# EAGLE board e-book_schema_v28 (EAGLE 9.7.0)
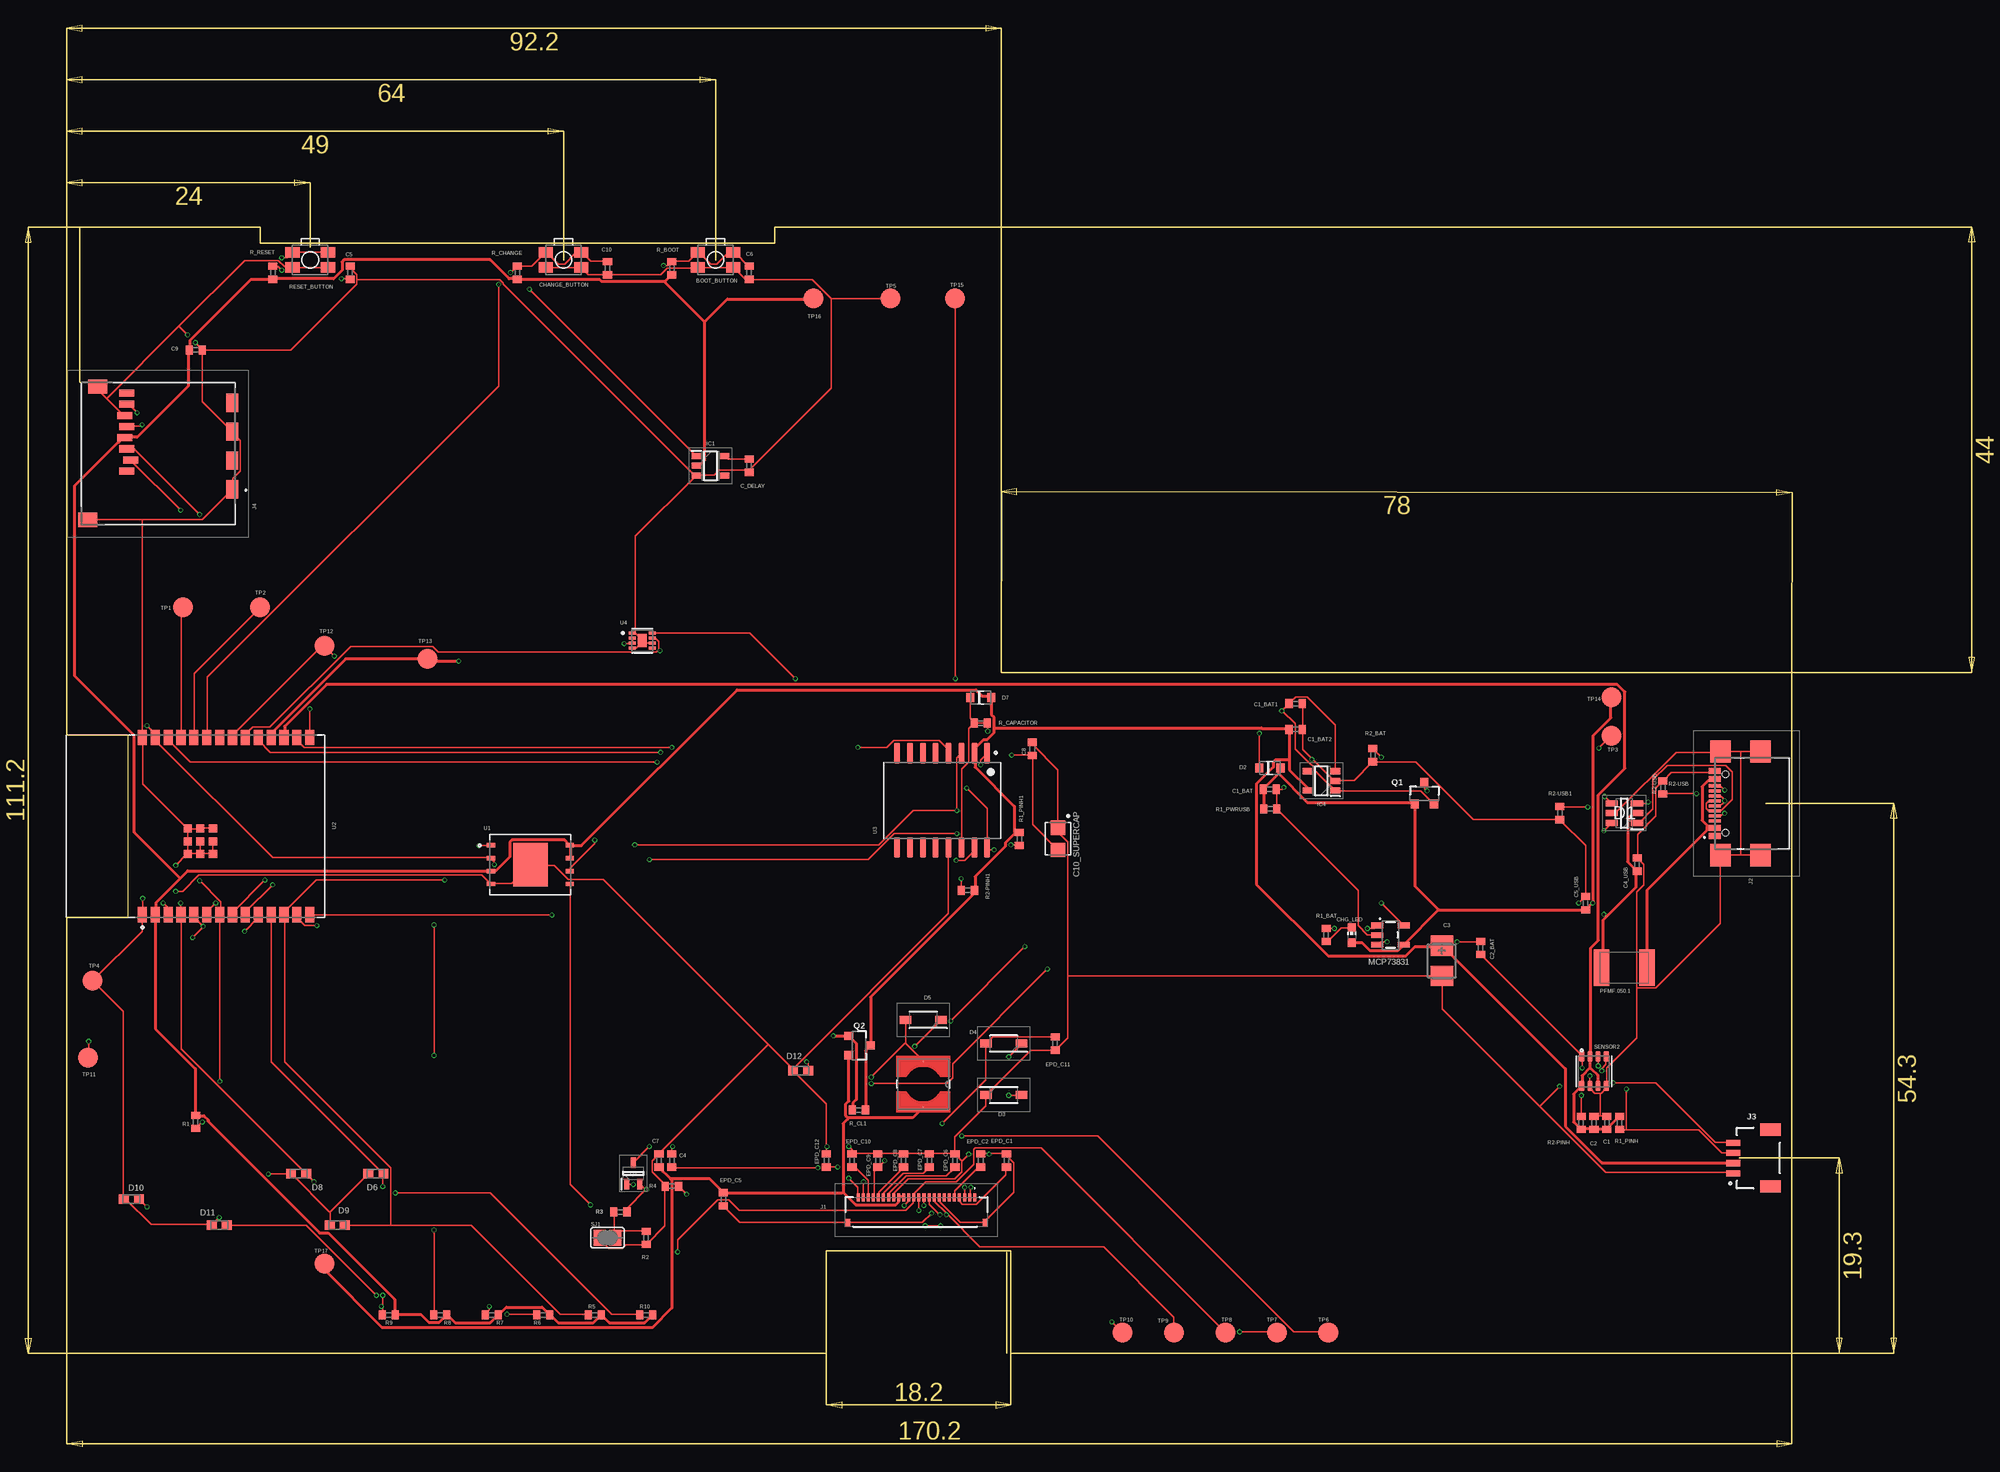
[diagram p0: board, top side]
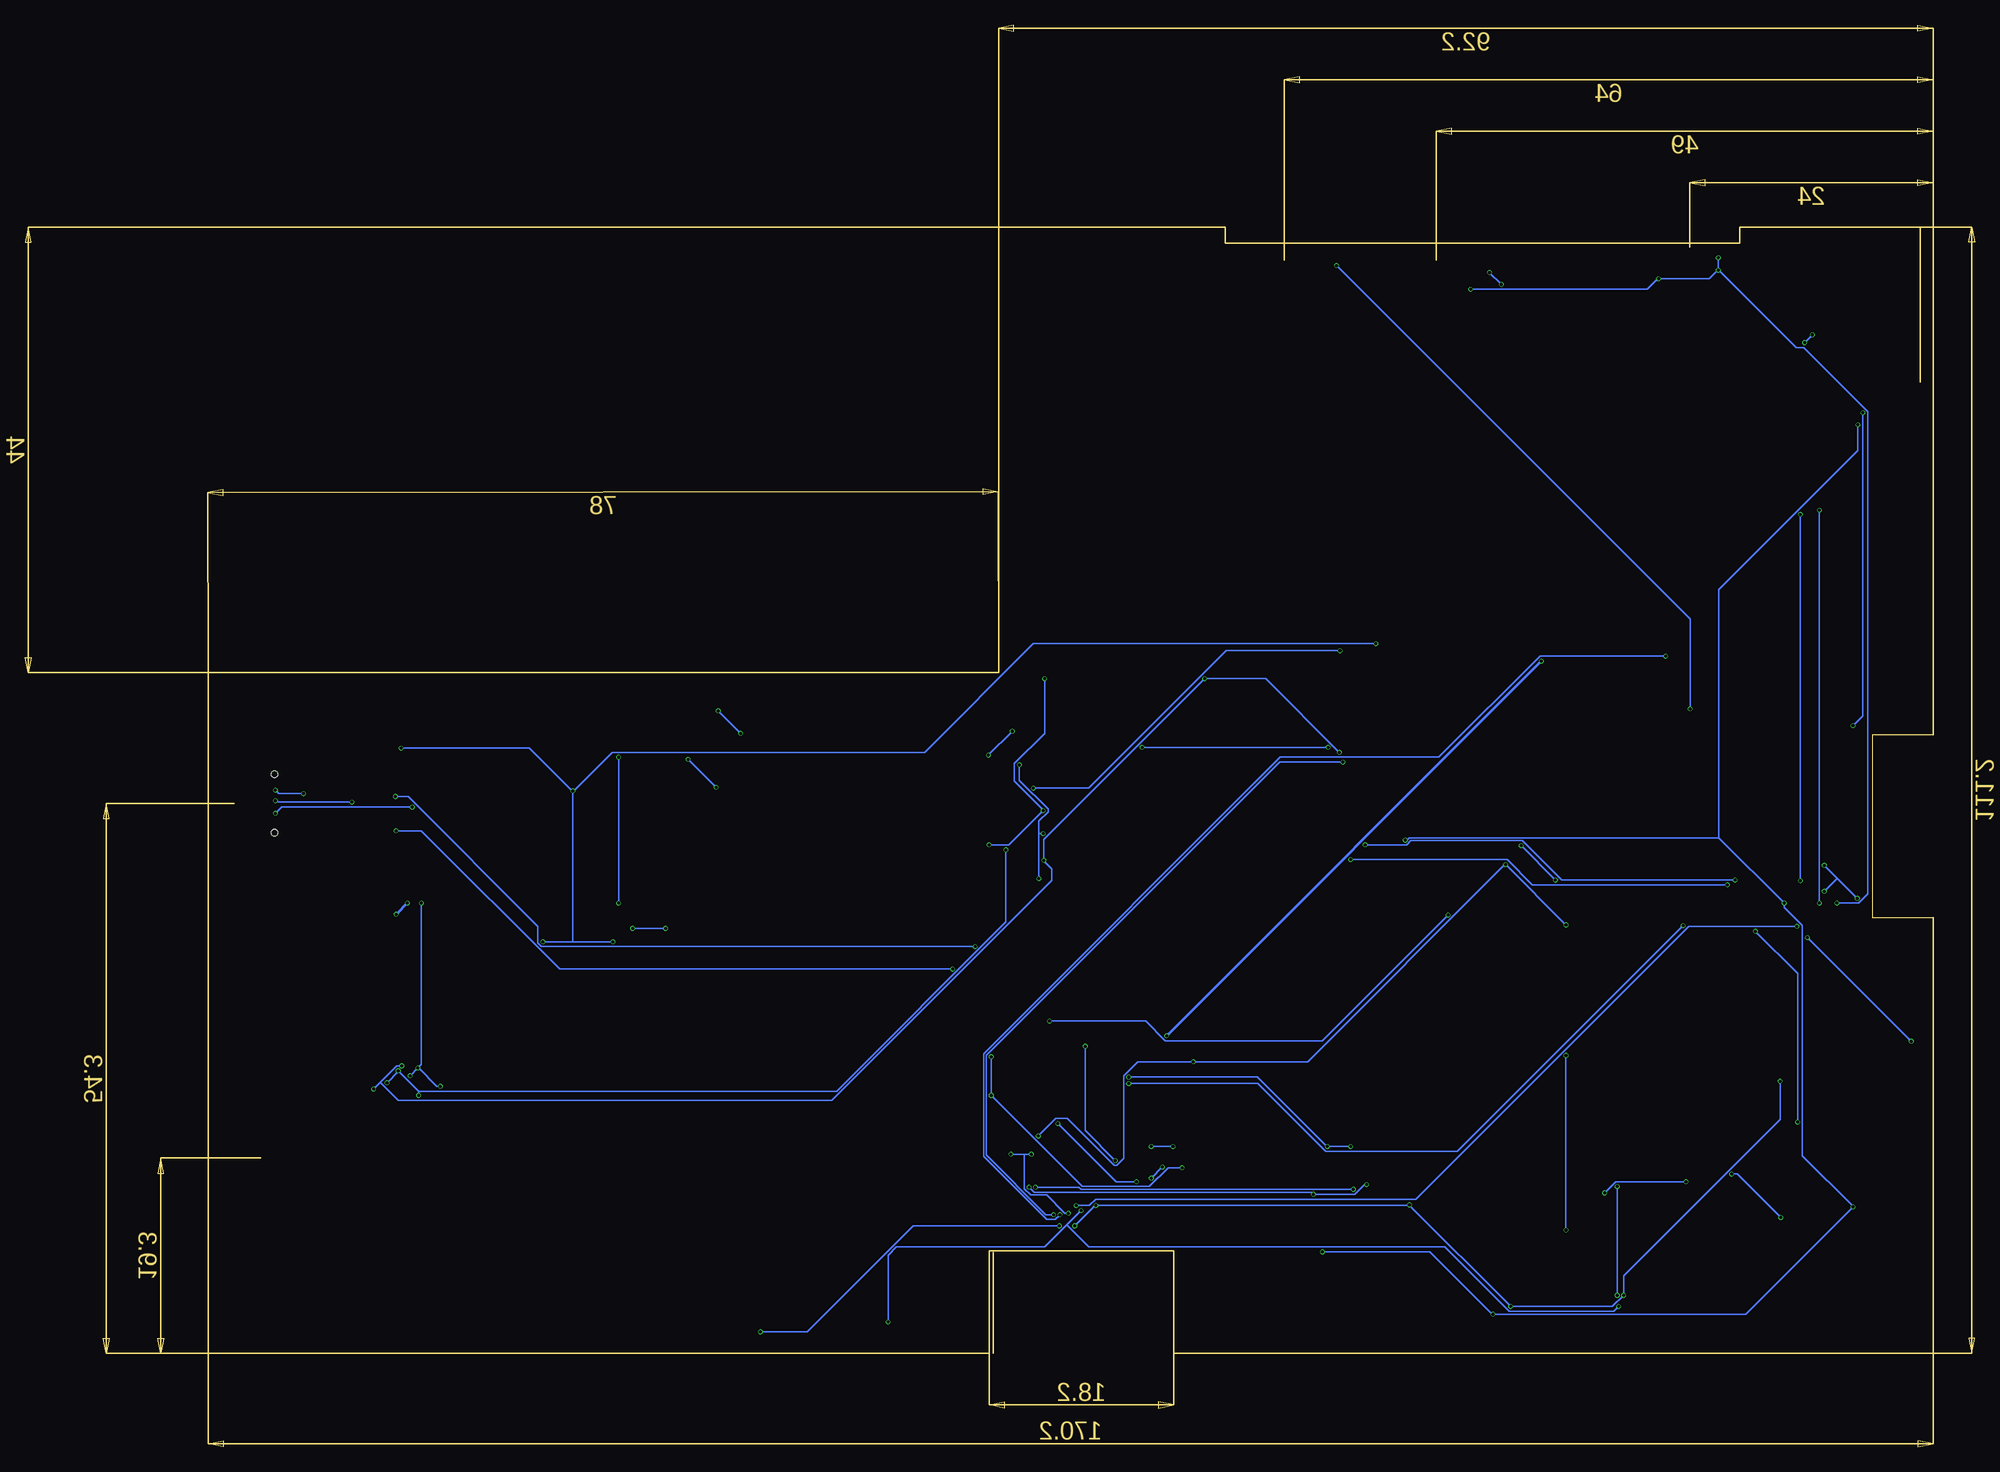
[diagram p1: board, bottom side, seen from below]

Size 170.2 x 111.2 mm. Coordinates in mm from the lower left corner, seen from the top.
Outline: 0,0 0,43.06 6,43.06 6,61.04 0,61.04 0,111.2 19.05,111.2 19.05,109.6 69.85,109.6 69.85,111.2 92.2,111.2 92.2,67.2 170.2,67.2 170.2,0 93.13,0 93.13,10.16 74.93,10.16 74.93,0 0,0
Copper layers (1*16): Top 0.035mm / dielectric 1.6mm / Bottom 0.035mm
Design rules "jlcpcb-2layers.edru *": minimum track width 0.15mm, minimum drill 0.3mm, track to track 5mil, track to pad 5mil, pad to pad 5mil, via to via 5mil, smd to smd 5mil, copper to edge 0.2mm, drill to drill 6mil, minimum pad ring 10mil, minimum via ring 3mil, stop-mask expansion 4mil, vias tented up to drill 0mil, thermal gap 10mil
Net classes: 1 Power: width 0.3 mm

## Footprints (pad centres in the part's own frame; a part is rotated, then mirrored left to right if it is on the bottom)
MYBUTTON = smd 1.4 x 1.05: 1 1.75,0.75; 2 -1.75,0.75; 3 -1.75,-0.75; 4 1.75,-0.75
EAGLE-LTSPICE_C0402 = smd 0.7 x 0.9: 1 -0.65,0; 2 0.65,0
RCL_CT3528 = smd 2 x 2.2: + -1.5,0; - 1.5,0
CAPCP3225X100N = smd 1.4 x 1.4: 1 -1.1,0; 2 1.1,0
ADAFRUIT_CHIP-LED0603 = smd 0.8 x 0.8: A 0,-0.75; C 0,0.75
SOT95P280X145-6N = smd 1.2 x 0.6: 1 -1.25,0.95; 2 -1.25,0; 3 -1.25,-0.95; 4 1.25,-0.95; 5 1.25,0; 6 1.25,0.95
ESP32_WROVER_AVX---SD0805S020S1R0_AVX_SD0805S020S1R0_0 = smd 0.8 x 0.9: 1 -1.05,0; 2 1.05,0
SOD3716X135N = smd 1.15 x 0.8: 1 -1.75,0; 2 1.75,0
DIOC1608X36N = smd 0.97 x 0.94: 1 -0.75,0; 2 0.75,0
SOT95P280X125-5N = smd 0.9 x 0.6: 1 -1.4,0.95; 2 -1.4,0; 3 -1.4,-0.95; 4 1.4,-0.95; 5 1.4,0.95
SOT95P280X120-5N = smd 0.9 x 0.6: 1 -1.4,0.95; 2 -1.4,0; 3 -1.4,-0.95; 4 1.4,-0.95; 5 1.4,0.95
FH34SRJ24S05SH99 = smd 0.3 x 0.8: 1 5.75,1.45; 2 5.25,1.45; 3 4.75,1.45; 4 4.25,1.45; 5 3.75,1.45; 6 3.25,1.45; 7 2.75,1.45; 8 2.25,1.45; 9 1.75,1.45; 10 1.25,1.45; 11 0.75,1.45; 12 0.25,1.45; 13 -0.25,1.45; 14 -0.75,1.45; 15 -1.25,1.45; 16 -1.75,1.45; 17 -2.25,1.45; 18 -2.75,1.45; 19 -3.25,1.45; 20 -3.75,1.45; 21 -4.25,1.45; 22 -4.75,1.45; 23 -5.25,1.45; 24 -5.75,1.45 | smd 0.4 x 0.8: MP1 6.75,-1.05; MP2 -6.75,-1.05
SAMACSYS_PARTS_USB4110GFA = smd 0.3 x 1.15: A1 -3.35,3.678; A4 -2.55,3.678; A5 -1.25,3.678; A6 -0.25,3.678; A7 0.25,3.678; A8 1.25,3.678; A9 2.55,3.678; A12 3.35,3.678; B1 3.05,3.678; B4 2.25,3.678; B5 1.75,3.678; B6 0.75,3.678; B7 -0.75,3.678; B8 -1.75,3.678; B9 -2.25,3.678; B12 -3.05,3.678 | smd 2.18 x 2: MP1 -5.11,-0.827; MP2 5.11,-0.827; MP3 -5.11,3.103; MP4 5.11,3.103 | hole 0.65: -2.89,2.603; 2.89,2.603
JST04_1MM_RA = smd 0.6 x 1.35: 1 -1.5,0; 2 -0.5,0; 3 0.5,0; 4 1.5,0 | smd 1.2 x 2: NC1 2.8,-3.675; NC2 -2.8,-3.675
112ATAARR03ATTEND = smd 1.8 x 1.2: G1 10.6,10.4; G2 4.9,10.4; S1 7.75,10.4; S2 2.05,10.4 | smd 1.4 x 1.9: G3 13.6,-3.85; G4 0.45,-2.85 | smd 0.7 x 1.5: P1 8.8,0; P2 7.7,0.4; P3 6.6,0; P4 5.5,-0.2; P5 4.4,0; P6 3.3,-0.2; P7 2.2,0; P8 1.1,0
IND_4828-WE-TPC_WRE = smd 0.127 x 0.127: 1 -2.286,0; 2 2.286,0
ESP32_WROVER_SPARKFUN-IC-POWER_SOT23-5 = smd 0.55 x 1.2: 1 -0.95,-1.3; 2 0,-1.3; 3 0.95,-1.3; 4 0.95,1.3; 5 -0.95,1.3
ESP32C6_VARISTOR_CT/CN1812 = smd 1.5 x 3.6: 1 -2.25,0; 2 2.25,0
ESP32_WROVER_SPARKFUN-DISCRETESEMI_SOT23-3 = smd 0.8 x 0.9: 1 -0.95,-1; 2 0.95,-1; 3 0,1.1
SOT65P210X110-3N = smd 1.05 x 0.5: 1 -1.05,0.65; 2 -1.05,-0.65; 3 1.05,0
ESP32_WROVER_EAGLE-LTSPICE_R0402 = smd 0.7 x 0.9: 1 -0.65,0; 2 0.65,0
ESP32_WROVER_BME680_PSON80P300X300X100-8N = smd 1.016 x 0.5: 1 1.458,1.2; 2 1.458,0.4; 3 1.458,-0.4; 4 1.458,-1.2; 5 -1.458,-1.22; 6 -1.458,-0.4; 7 -1.458,0.4; 8 -1.458,1.2
SJ = smd 1.168 x 1.6: 1 -0.762,0; 2 0.762,0
TP20R = smd 2 x 2: TP 0,0
SON127P600X800X80-9N = smd 0.94 x 0.44: 1 -3.895,1.905; 2 -3.895,0.635; 3 -3.895,-0.635; 4 -3.895,-1.905; 5 3.895,-1.905; 6 3.895,-0.635; 7 3.895,0.635; 8 3.895,1.905 | smd 3.4 x 4.3: 9 0,0
XCVR_ESP32-C6-WROOM-1-N8 = smd 1.5 x 0.9: 1 -8.75,5.26; 2 -8.75,3.99; 3 -8.75,2.72; 4 -8.75,1.45; 5 -8.75,0.18; 6 -8.75,-1.09; 7 -8.75,-2.36; 8 -8.75,-3.63; 9 -8.75,-4.9; 10 -8.75,-6.17; 11 -8.75,-7.44; 12 -8.75,-8.71; 13 -8.75,-9.98; 14 -8.75,-11.25; 15 8.75,-11.25; 16 8.75,-9.98; 17 8.75,-8.71; 18 8.75,-7.44; 19 8.75,-6.17; 20 8.75,-4.9; 21 8.75,-3.63; 22 8.75,-2.36; 23 8.75,-1.09; 24 8.75,0.18; 25 8.75,1.45; 26 8.75,2.72; 27 8.75,3.99; 28 8.75,5.26 | smd 0.8 x 0.8: 29_1 -2.755,0.79; 29_2 -1.505,0.79; 29_3 -0.255,0.79; 29_4 -2.755,-0.46; 29_5 -1.505,-0.46; 29_6 -0.255,-0.46; 29_7 -2.755,-1.71; 29_8 -1.505,-1.71; 29_9 -0.255,-1.71
SOIC127P1032X265-16N = smd 2.05 x 0.59: 1 -4.655,4.445; 2 -4.655,3.175; 3 -4.655,1.905; 4 -4.655,0.635; 5 -4.655,-0.635; 6 -4.655,-1.905; 7 -4.655,-3.175; 8 -4.655,-4.445; 9 4.655,-4.445; 10 4.655,-3.175; 11 4.655,-1.905; 12 4.655,-0.635; 13 4.655,0.635; 14 4.655,1.905; 15 4.655,3.175; 16 4.655,4.445
SON50P200X200X80-9N = smd 0.76 x 0.27: 1 -0.985,0.75; 2 -0.985,0.25; 3 -0.985,-0.25; 4 -0.985,-0.75; 5 0.985,-0.75; 6 0.985,-0.25; 7 0.985,0.25; 8 0.985,0.75 | smd 0.9 x 1.3: 9 0,0

## Placement (x,y rotation side)
BOOT_BUTTON  BUTTON_CUSYOMV1  [MYBUTTON]  64,107.95 180 top
C1  100nF  [EAGLE-LTSPICE_C0402]  151.95,22.78 90 top
C1_BAT  4.7uF  [EAGLE-LTSPICE_C0402]  118.69,55.7 0 top
C1_BAT1  4.7uF  [EAGLE-LTSPICE_C0402]  121.24,64.15 0 top
C1_BAT2  4.7uf  [EAGLE-LTSPICE_C0402]  121.24,61.61 0 top
C2  100nF  [EAGLE-LTSPICE_C0402]  150.68,22.78 90 top
C2_BAT  4.7uF  [EAGLE-LTSPICE_C0402]  139.49,40.04 270 top
C3  100uF TANT  [RCL_CT3528]  135.68,38.77 270 top
C4  4.7uF/25V  [EAGLE-LTSPICE_C0402]  59.69,19.05 90 top
C4_USB  100nF  [EAGLE-LTSPICE_C0402]  154.94,48.26 90 top
C5  1uF  [EAGLE-LTSPICE_C0402]  27.94,106.68 90 top
C5_USB  4.7uF  [EAGLE-LTSPICE_C0402]  149.86,44.45 90 top
C6  100nF  [EAGLE-LTSPICE_C0402]  67.31,106.68 270 top
C7  10uF  [EAGLE-LTSPICE_C0402]  58.42,19.05 90 top
C8  100nF  [EAGLE-LTSPICE_C0402]  95.25,59.69 90 top
C9  100nF  [EAGLE-LTSPICE_C0402]  12.7,99.06 0 top
C10  100nF  [EAGLE-LTSPICE_C0402]  53.34,107.13 270 top
C10_SUPERCAP  CPH3225A  [CAPCP3225X100N]  97.79,50.8 270 top
C_DELAY  100nF  [EAGLE-LTSPICE_C0402]  67.31,87.63 270 top
CHANGE_BUTTON  BUTTON_CUSYOMV1  [MYBUTTON]  49,107.95 180 top
CHG_LED  [ADAFRUIT_CHIP-LED0603]  126.79,41.31 0 top
D1  USBLC6-2SC6Y  [SOT95P280X145-6N]  153.67,53.34 180 top
D2  ESP32_WROVER_AVX---SD0805S020S1R0_AVX_SD0805S020S1R0_0_0AVX_SD0805S020S1R0_0_0  [ESP32_WROVER_AVX---SD0805S020S1R0_AVX_SD0805S020S1R0_0]  118.7,57.8 0 top
D3  MBR0530  [SOD3716X135N]  92.43,25.52 0 top
D4  MBR0530  [SOD3716X135N]  92.43,30.6 180 top
D5  MBR0530  [SOD3716X135N]  84.5,32.94 180 top
D6  PGB1010603MR  [DIOC1608X36N]  30.48,17.78 0 top
D7  ESP32_WROVER_AVX---SD0805S020S1R0_AVX_SD0805S020S1R0_0_0AVX_SD0805S020S1R0_0_0  [ESP32_WROVER_AVX---SD0805S020S1R0_AVX_SD0805S020S1R0_0]  90.17,64.77 0 top
D8  PGB1010603MR  [DIOC1608X36N]  22.86,17.78 0 top
D9  PGB1010603MR  [DIOC1608X36N]  26.67,12.7 0 top
D10  PGB1010603MR  [DIOC1608X36N]  6.35,15.24 0 top
D11  PGB1010603MR  [DIOC1608X36N]  15.03,12.7 0 top
D12  PGB1010603MR  [DIOC1608X36N]  72.39,27.94 0 top
EPD_C1  1uF/50V  [EAGLE-LTSPICE_C0402]  92.71,19.05 90 top
EPD_C2  1uF/50V  [EAGLE-LTSPICE_C0402]  90.17,19.05 90 top
EPD_C5  0.1uF/50V  [EAGLE-LTSPICE_C0402]  64.77,15.24 270 top
EPD_C6  1uF/50V  [EAGLE-LTSPICE_C0402]  87.63,19.05 90 top
EPD_C7  1uF/50V  [EAGLE-LTSPICE_C0402]  85.09,19.05 90 top
EPD_C8  1uF/50V  [EAGLE-LTSPICE_C0402]  82.55,19.05 90 top
EPD_C9  1uF/50V  [EAGLE-LTSPICE_C0402]  80.01,19.05 90 top
EPD_C10  1uF/50V  [EAGLE-LTSPICE_C0402]  77.47,19.05 90 top
EPD_C11  1uF/50V  [EAGLE-LTSPICE_C0402]  97.51,30.6 270 top
EPD_C12  1uF/50V  [EAGLE-LTSPICE_C0402]  74.93,19.05 90 top
IC1  BD5229G-TR  [SOT95P280X125-5N]  63.5,87.63 0 top
IC4  XC6220A331MR-G  [SOT95P280X120-5N]  123.78,56.53 180 top
J1  FH34SRJ-24S-0.5SH_99_  [FH34SRJ24S05SH99]  83.82,13.97 0 top
J2  SAMACSYS_PARTS_USB4110-GF-A  [SAMACSYS_PARTS_USB4110GFA]  166.28,54.3 90 top
J3  QWIIC_RIGHT_ANGLE  [JST04_1MM_RA]  164.43,19.3 90 top
J4  112A-TAAR-R03_ATTEND  [112ATAARR03ATTEND]  5.89,95.9 270 top
L1  68uH  [IND_4828-WE-TPC_WRE]  84.5,26.59 270 top
MCP73831  ESP32_WROVER_SPARKFUN-IC-POWER_MCP73831  [ESP32_WROVER_SPARKFUN-IC-POWER_SOT23-5]  130.6,41.31 270 top
PFMF.050.1  ESP32C6_VARISTORCN1812  [ESP32C6_VARISTOR_CT/CN1812]  153.67,38.1 180 top
Q1  20V/4.2A/52mΩ/1.4W  [ESP32_WROVER_SPARKFUN-DISCRETESEMI_SOT23-3]  133.94,55.26 0 top
Q2  20V/4.2A/52mΩ/1.4W  [ESP32_WROVER_SPARKFUN-DISCRETESEMI_SOT23-3]  78.15,30.4 270 top
Q3  SI1308EDL-T1-GE3  [SOT65P210X110-3N]  55.88,17.78 90 top
R1  10k  [ESP32_WROVER_EAGLE-LTSPICE_R0402]  12.7,22.86 90 top
R1_BAT  200  [ESP32_WROVER_EAGLE-LTSPICE_R0402]  124.25,41.31 90 top
R1_PINH  10K  [ESP32_WROVER_EAGLE-LTSPICE_R0402]  153.22,22.78 90 top
R1_PINH1  10K  [ESP32_WROVER_EAGLE-LTSPICE_R0402]  93.98,50.8 90 top
R1_PWRUSB  100k  [ESP32_WROVER_EAGLE-LTSPICE_R0402]  118.73,53.76 180 top
R2  2.2  [ESP32_WROVER_EAGLE-LTSPICE_R0402]  57.15,11.43 90 top
R2-PINH  10K  [ESP32_WROVER_EAGLE-LTSPICE_R0402]  149.41,22.78 270 top
R2-PINH1  10K  [ESP32_WROVER_EAGLE-LTSPICE_R0402]  88.9,45.72 0 top
R2-USB  5K1  [ESP32_WROVER_EAGLE-LTSPICE_R0402]  157.48,55.88 90 top
R2-USB1  5K1  [ESP32_WROVER_EAGLE-LTSPICE_R0402]  147.32,53.34 90 top
R2_BAT  2K  [ESP32_WROVER_EAGLE-LTSPICE_R0402]  128.86,59.07 90 top
R3  0.47  [ESP32_WROVER_EAGLE-LTSPICE_R0402]  54.61,13.97 0 top
R4  10k  [ESP32_WROVER_EAGLE-LTSPICE_R0402]  59.69,16.51 0 top
R5  10K  [ESP32_WROVER_EAGLE-LTSPICE_R0402]  52.07,3.81 0 top
R6  10K  [ESP32_WROVER_EAGLE-LTSPICE_R0402]  46.99,3.81 0 top
R7  10K  [ESP32_WROVER_EAGLE-LTSPICE_R0402]  41.91,3.81 0 top
R8  10K  [ESP32_WROVER_EAGLE-LTSPICE_R0402]  36.83,3.81 0 top
R9  10K  [ESP32_WROVER_EAGLE-LTSPICE_R0402]  31.75,3.81 0 top
R10  10K  [ESP32_WROVER_EAGLE-LTSPICE_R0402]  57.15,3.81 0 top
R_BOOT  10K  [ESP32_WROVER_EAGLE-LTSPICE_R0402]  59.69,107.13 90 top
R_CAPACITOR  15  [ESP32_WROVER_EAGLE-LTSPICE_R0402]  90.17,62.23 0 top
R_CHANGE  10K  [ESP32_WROVER_EAGLE-LTSPICE_R0402]  44.45,106.68 90 top
R_CL1  10k  [ESP32_WROVER_EAGLE-LTSPICE_R0402]  78.15,24.05 180 top
R_RESET  10K  [ESP32_WROVER_EAGLE-LTSPICE_R0402]  20.32,106.68 90 top
RESET_BUTTON  BUTTON_CUSYOMV1  [MYBUTTON]  24,107.95 180 top
SENSOR2  ESP32_WROVER_BME680_BME680  [ESP32_WROVER_BME680_PSON80P300X300X100-8N]  150.68,27.86 90 top
SJ1  [SJ]  53.34,11.43 0 top
TP1  TPTP20R  [TP20R]  11.43,73.66 0 top
TP2  TPTP20R  [TP20R]  19.05,73.66 0 top
TP3  TPTP20R  [TP20R]  152.4,60.96 0 top
TP4  TPTP20R  [TP20R]  2.54,36.83 0 top
TP5  TPTP20R  [TP20R]  81.28,104.14 0 top
TP6  TPTP20R  [TP20R]  124.46,2.09 0 top
TP7  TPTP20R  [TP20R]  119.38,2.09 0 top
TP8  TPTP20R  [TP20R]  114.3,2.09 0 top
TP9  TPTP20R  [TP20R]  109.22,2.09 0 top
TP10  TPTP20R  [TP20R]  104.14,2.09 0 top
TP11  TPTP20R  [TP20R]  2.09,29.21 0 top
TP12  TPTP20R  [TP20R]  25.4,69.85 0 top
TP13  TPTP20R  [TP20R]  35.56,68.58 0 top
TP14  TPTP20R  [TP20R]  152.4,64.77 0 top
TP15  TPTP20R  [TP20R]  87.63,104.14 0 top
TP16  TPTP20R  [TP20R]  73.66,104.14 0 top
TP17  TPTP20R  [TP20R]  25.4,8.89 0 top
U1  W25Q512JVEIQ  [SON127P600X800X80-9N]  45.72,48.26 0 top
U2  ESP32-C6-WROOM-1-N8  [XCVR_ESP32-C6-WROOM-1-N8]  12.7,52.07 90 top
U3  DS3231SN#  [SOIC127P1032X265-16N]  86.36,54.61 270 top
U4  MAX17048G+T10  [SON50P200X200X80-9N]  56.77,70.37 0 top

## Library data of the parts
BOOT_BUTTON CHANGE_BUTTON CHG_LED PFMF.050.1 RESET_BUTTON SJ1 TP1-TP17 = DeskAssistant v19 v1
C1 C1_BAT C1_BAT1 C1_BAT2 C2 C2_BAT C4 C4_USB C5 C5_USB C6-C10 C_DELAY EPD_C1 EPD_C2 EPD_C5-EPD_C12 = DeskAssistant v19 v1; SPICEMODEL: NONE; SPICEPREFIX: C
C3 = DeskAssistant v19 v1; SPICEPREFIX: C
C10_SUPERCAP = DeskAssistant v19 v1; AVAILABILITY: Not in stock; CHECK_PRICES: https://www.snapeda.com/parts/CPH3225A/Seiko+Instruments/view-part/?ref=eda; DESCRIPTION: 11 mF (EDLC) Supercapacitor 3.3 V 1210 (3225 Metric) - -; MF: Seiko Instruments; MP: CPH3225A; PACKAGE: 1210 Seiko; PRICE: None; PURCHASE-URL: https://www.snapeda.com/api/url_track_click_mouser/?unipart_id=562593&manufacturer=Seiko Instruments&part_name=CPH3225A&search_term=None; SNAPEDA_LINK: https://www.snapeda.com/parts/CPH3225A/Seiko+Instruments/view-part/?ref=snap
D1 = DeskAssistant v19 v1; AVAILABILITY: In Stock; CHECK_PRICES: https://www.snapeda.com/parts/USBLC6-2SC6Y/STMicroelectronics/view-part/?ref=eda; DESCRIPTION: 17V Clamp 5A (8/20µs) Ipp Tvs Diode Surface Mount SOT-23-6; MF: STMicroelectronics; MP: USBLC6-2SC6Y; PACKAGE: SOT-23-6 STMicroelectronics; PRICE: None; SNAPEDA_LINK: https://www.snapeda.com/parts/USBLC6-2SC6Y/STMicroelectronics/view-part/?ref=snap
D2 D7 = DeskAssistant v19 v1; CENTROID_NOT_SPECIFIED: No; DATASHEET: http://datasheets.avx.com/schottky.pdf; DIGIKEY_DESCRIPTION: DIODE SCHOTTKY 20V 1A 0805; DIGIKEY_PART_NUMBER: 478-7800-1-ND; LEAD_FREE: yes; MF: AVX; MOUSER_PART_NUMBER: 581-SD0805S020S1R0; PACKAGE: 0805 (2012 metric); PREFIX: D; ROHS: yes; TEMPERATURE_RANGE_HIGH: +125°C; TEMPERATURE_RANGE_LOW: -55°C
D3-D5 = DeskAssistant v19 v1; AVAILABILITY: In Stock; CHECK_PRICES: https://www.snapeda.com/parts/MBR0530/Onsemi/view-part/?ref=eda; DESCRIPTION: Diode Schottky 30 V 500mA Surface Mount SOD-123; MF: ON Semiconductor; MP: MBR0530; PACKAGE: SOD-123-2 ON Semiconductor; PRICE: None; PURCHASE-URL: https://www.snapeda.com/api/url_track_click_mouser/?unipart_id=179458&manufacturer=ON Semiconductor&part_name=MBR0530&search_term=None; SNAPEDA_LINK: https://www.snapeda.com/parts/MBR0530/Onsemi/view-part/?ref=snap
D6 D8-D12 = DeskAssistant v19 v1; AVAILABILITY: In Stock; CHECK_PRICES: https://www.snapeda.com/parts/PGB1010603MR/Littelfuse/view-part/?ref=eda; DESCRIPTION: 150V (Typ) Clamp - Ipp Tvs Diode Surface Mount 0603 (1608 Metric); MF: Littelfuse Inc.; MP: PGB1010603MR; PACKAGE: 0603 Littelfuse Inc.; PRICE: None; PURCHASE-URL: https://www.snapeda.com/api/url_track_click_mouser/?unipart_id=5659453&manufacturer=Littelfuse Inc.&part_name=PGB1010603MR&search_term=None; SNAPEDA_LINK: https://www.snapeda.com/parts/PGB1010603MR/Littelfuse/view-part/?ref=snap
IC1 = DeskAssistant v19 v1; DESCRIPTION: Voltage Detector with Adjustable Delay Time: CMOS processes are utilized to develop high precision, low current consumption CMOS reset ICs that allow arbitrary setting of the delay time. The extensive lineup includes both Nch Open Drain and CMOS output types in a wide range of detection voltages (from 2.3V to 6.0V, in 0.1V steps), enabling selection of the ideal solution based on customer requirements. In addition, the entire series is of course both lead-free and RoHS-compliant.; HEIGHT: 1.25mm; MANUFACTURER_NAME: ROHM Semiconductor; MANUFACTURER_PART_NUMBER: BD5229G-TR; MOUSER_PART_NUMBER: 755-BD5229G-TR; MOUSER_PRICE-STOCK: https://www.mouser.co.uk/ProductDetail/ROHM-Semiconductor/BD5229G-TR?qs=4kLU8WoGk0vvnhrrYwdszw%3D%3D
IC4 = DeskAssistant v19 v1; DESCRIPTION: LDO Voltage Regulators; HEIGHT: 1.2mm; MANUFACTURER_NAME: Torex; MANUFACTURER_PART_NUMBER: XC6220A331MR-G; MOUSER_PART_NUMBER: 865-XC6220A331MR-G; MOUSER_PRICE-STOCK: https://www.mouser.co.uk/ProductDetail/Torex-Semiconductor/XC6220A331MR-G?qs=AsjdqWjXhJ8ZSWznL1J0gg%3D%3D
J1 = DeskAssistant v19 v1; DESCRIPTION: 24 Position FFC, FPC Connector Contacts, Top and Bottom 0.020" (0.50mm) Surface Mount, Right Angle; HEIGHT: 1.1mm; MANUFACTURER_NAME: Hirose; MANUFACTURER_PART_NUMBER: FH34SRJ-24S-0.5SH(99); MOUSER_PART_NUMBER: 798-FH34SRJ24S05SH99; MOUSER_PRICE-STOCK: https://www.mouser.co.uk/ProductDetail/Hirose-Connector/FH34SRJ-24S-0.5SH99?qs=vcbW%252B4%252BSTIpKBl5ap9J8Fw%3D%3D
J2 = DeskAssistant v19 v1; DESCRIPTION: CONN USB 2.0 TYPE-C R/A SMT; HEIGHT: 3.26mm; MANUFACTURER_NAME: GCT (GLOBAL CONNECTOR TECHNOLOGY); MANUFACTURER_PART_NUMBER: USB4110-GF-A; MOUSER_PART_NUMBER: 640-USB4110-GF-A; MOUSER_PRICE-STOCK: https://www.mouser.co.uk/ProductDetail/GCT/USB4110-GF-A?qs=KUoIvG%2F9IlYiZvIXQjyJeA%3D%3D
J3 = DeskAssistant v19 v1; PROD_ID: CONN-13694
J4 = DeskAssistant v19 v1; DESCRIPTION: Micro SD Card Socket, Push-Push Type, Top Mount, SMT, H=1.83mm, 10u; HEIGHT: 1.9mm; MANUFACTURER_NAME: ATTEND; MANUFACTURER_PART_NUMBER: 112A-TAAR-R03 ATTEND
L1 = DeskAssistant v19 v1; COPYRIGHT: Copyright (C) 2024 Ultra Librarian. All rights reserved.; MANUFACTURER_PART_NUMBER: 744043680; MFR_NAME: Wurth Electronics
MCP73831 = DeskAssistant v19 v1; PROD_ID: IC-09995
Q1 Q2 = DeskAssistant v19 v1; PROD_ID: TRAN-14388
Q3 = DeskAssistant v19 v1; AVAILABILITY: In Stock; CHECK_PRICES: https://www.snapeda.com/parts/SI1308EDL-T1-GE3/Vishay+Siliconix/view-part/?ref=eda; DESCRIPTION: Si1308EDL-T1-GE3 N-channel MOSFET Transistor, 1.5 A, 30 V, 3-Pin SC-70 | Siliconix / Vishay SI1308EDL-T1-GE3; MF: Vishay Siliconix; MP: SI1308EDL-T1-GE3; PACKAGE: SOT-323 Vishay Semiconductor; PRICE: None; PURCHASE-URL: https://www.snapeda.com/api/url_track_click_mouser/?unipart_id=274603&manufacturer=Vishay Siliconix&part_name=SI1308EDL-T1-GE3&search_term=None; SNAPEDA_LINK: https://www.snapeda.com/parts/SI1308EDL-T1-GE3/Vishay+Siliconix/view-part/?ref=snap
R1 R1_BAT R1_PINH R1_PINH1 R1_PWRUSB R2 R2-PINH R2-PINH1 R2-USB R2-USB1 R2_BAT R3-R10 R_BOOT R_CAPACITOR R_CHANGE R_CL1 R_RESET = DeskAssistant v19 v1; SPICEMODEL: NONE; SPICEPREFIX: R
SENSOR2 = DeskAssistant v19 v1; AVAILABILITY: Unavailable; DESCRIPTION: Integrated Environmental Unit; MF: Bosch Sensortec; MP: BME680; PACKAGE: LGA-8 Bosch Tools; PRICE: None
U1 = DeskAssistant v19 v1; AVAILABILITY: In Stock; CHECK_PRICES: https://www.snapeda.com/parts/W25Q512JVEIQ/Winbond+Electronics/view-part/?ref=eda; DESCRIPTION: FLASH - NOR Memory IC 512Mb (64M x 8) SPI - Quad I/O 133 MHz 8-WSON (8x6); MF: Winbond Electronics; MP: W25Q512JVEIQ; PACKAGE: Package; PRICE: None; SNAPEDA_LINK: https://www.snapeda.com/parts/W25Q512JVEIQ/Winbond+Electronics/view-part/?ref=snap
U2 = DeskAssistant v19 v1; AVAILABILITY: In Stock; CHECK_PRICES: https://www.snapeda.com/parts/ESP32-C6-WROOM-1-N8/Espressif+Systems/view-part/?ref=eda; DESCRIPTION: Multiprotocol Modules ESP32-C6 module, Wi-Fi 6 in 2.4 GHz band, Bluetooth 5, Zigbee 3.0 and Thread. ESP34-WROOM Compatible - ENGINEERING SAMPLE; MF: Espressif Systems; MP: ESP32-C6-WROOM-1-N8; PACKAGE: None; PRICE: None; SNAPEDA_LINK: https://www.snapeda.com/parts/ESP32-C6-WROOM-1-N8/Espressif+Systems/view-part/?ref=snap
U3 = DeskAssistant v19 v1; AVAILABILITY: In Stock; CHECK_PRICES: https://www.snapeda.com/parts/DS3231SN%23/Analog+Devices/view-part/?ref=eda; DESCRIPTION: Extremely Accurate I²C-Integrated RTC/TCXO/Crystal; MF: Analog Devices; MP: DS3231SN#; PACKAGE: SOIC-16 Maxim; PRICE: None; PURCHASE-URL: https://www.snapeda.com/api/url_track_click_mouser/?unipart_id=99048&manufacturer=Analog Devices&part_name=DS3231SN#&search_term=None; SNAPEDA_LINK: https://www.snapeda.com/parts/DS3231SN%23/Analog+Devices/view-part/?ref=snap
U4 = DeskAssistant v19 v1; AVAILABILITY: In Stock; CHECK_PRICES: https://www.snapeda.com/parts/MAX17048G+T10/Analog+Devices/view-part/?ref=eda; DESCRIPTION: 3µA 1-Cell/2-Cell Fuel Gauge with ModelGauge; MF: Analog Devices; MP: MAX17048G+T10; PACKAGE: TDFN-8 Maxim; PRICE: None; PURCHASE-URL: https://www.snapeda.com/api/url_track_click_mouser/?unipart_id=329239&manufacturer=Analog Devices&part_name=MAX17048G+T10&search_term=None; SNAPEDA_LINK: https://www.snapeda.com/parts/MAX17048G+T10/Analog+Devices/view-part/?ref=snap

## Nets
3V3 [Power]: C1_BAT2.1 C3.+ C9.1 D7.2 IC1.2 IC4.5 J3.2 J4.P4 Q2.3 R1.2 R1_PINH1.2 R2-PINH1.2 R5.2 R6.2 R7.2 R8.2 R9.2 R10.2 R_BOOT.1 R_CHANGE.1 R_CL1.1 R_RESET.1 TP16.TP U1.3 U1.7 U1.8 U2.2 U3.2
32KHZ: R2-PINH1.1 U2.9 U3.1
DN: D1.1 J2.A7 J2.B7
DP: D1.3 J2.A6 J2.B6
EPD_3V3 [Power]: C7.1 EPD_C5.1 J1.15 J1.16 L1.2 Q2.2 TP17.TP
EPD_3V3_C [Power]: Q2.1 R_CL1.2 TP13.TP U2.18
EPD_BUSY: J1.9 TP9.TP U2.26
EPD_CS: D6.2 J1.12 R9.1 TP10.TP U2.11
EPD_DC: J1.11 TP11.TP U2.5
EPD_RST: J1.10 TP12.TP U2.21
FLASH_CS: D9.2 R5.1 U1.1 U2.12
GDR: J1.2 Q3.1 R4.2
GND: BOOT_BUTTON.1 BOOT_BUTTON.2 C1.2 C1_BAT1.2 C1_BAT2.2 C1_BAT.2 C2.2 C2_BAT.2 C3.- C4_USB.2 C5.2 C5_USB.2 C6.2 C7.2 C8.2 C9.2 C10.2 C10_SUPERCAP.1 C_DELAY.2 CHANGE_BUTTON.1 CHANGE_BUTTON.2 D1.5 D3.1 D6.1 D8.1 D9.1 D10.1 D11.1 D12.1 EPD_C1.2 EPD_C2.2 EPD_C5.2 EPD_C6.2 EPD_C7.2 EPD_C8.2 EPD_C9.2 EPD_C10.2 EPD_C11.2 EPD_C12.2 IC1.3 IC4.2 J1.8 J1.17 J1.MP1 J1.MP2 J2.A1 J2.A12 J2.B1 J2.B12 J2.MP1 J2.MP2 J2.MP3 J2.MP4 J3.1 J4.G1 J4.G2 J4.G3 J4.G4 J4.P6 MCP73831.2 R1_PWRUSB.1 R2-USB1.1 R2-USB.2 R2.1 R2_BAT.1 R4.1 RESET_BUTTON.1 RESET_BUTTON.2 SENSOR2.1 SENSOR2.5 SENSOR2.7 SJ1.1 TP4.TP TP5.TP U1.4 U1.9 U2.1 U2.28 U2.29_1 U2.29_2 U2.29_3 U2.29_4 U2.29_5 U2.29_6 U2.29_7 U2.29_8 U2.29_9 U3.13 U4.1 U4.4 U4.6 U4.9
GPIO8: R1.1 U2.10
I2C_PW [Power]: C1.1 C2.1 R1_PINH.2 R2-PINH.2 SENSOR2.2 SENSOR2.6 SENSOR2.8 U2.17
INT_RTC: R1_PINH1.1 TP15.TP U2.8 U3.3
IO/BOOT: BOOT_BUTTON.3 BOOT_BUTTON.4 C6.1 R_BOOT.2 U2.15
IO/CHANGE: C10.1 CHANGE_BUTTON.3 CHANGE_BUTTON.4 R_CHANGE.2 U2.23
MISO: D12.2 J4.P7 R8.1 TP6.TP U1.2 U2.27
MOSI: D11.2 J1.14 J4.P3 R7.1 TP7.TP U1.5 U2.7
N$1: J2.A5 R2-USB1.2
N$2: J2.B5 R2-USB.1
N$3: C1_BAT1.1 D2.1 IC4.1 IC4.3 Q1.2
N$5: EPD_C12.1 J1.24
N$6: C4.1 D3.2 D4.1
N$7: CHG_LED.C R1_BAT.1
N$8: MCP73831.1 R1_BAT.2
N$9: MCP73831.5 R2_BAT.2
N$10: C_DELAY.1 IC1.5
N$11: EPD_C10.1 J1.22
N$13: EPD_C8.1 J1.20
N$14: EPD_C7.1 J1.19
N$15: EPD_C6.1 J1.18
N$17: EPD_C2.1 J1.5
N$18: EPD_C1.1 J1.4
PREVGH: D5.1 EPD_C9.1 J1.21
PREVGL: D4.2 EPD_C11.1 J1.23
RESE: J1.3 Q3.2 R3.2
RESE': R2.2 R3.1 SJ1.2
RESET: C5.1 IC1.1 R_RESET.2 RESET_BUTTON.3 RESET_BUTTON.4 U2.3
RTC_RST: U2.16 U3.4
RX: TP2.TP U2.24
SCK: D10.2 J1.13 J4.P5 R6.1 TP8.TP U1.6 U2.6
SCL: J3.4 R2-PINH.1 SENSOR2.4 U2.20 U3.16 U4.7
SDA: J3.3 R1_PINH.1 SENSOR2.3 U2.19 U3.15 U4.8
SRC: C4.2 D5.2 L1.1 Q3.3
SS_SD: D8.2 J4.P2 R10.1 U2.4
TX: TP1.TP U2.25
USB_D+: D1.4 U2.14
USB_D-: D1.6 U2.13
VBAT: C2_BAT.1 MCP73831.3 Q1.3 TP3.TP U4.2 U4.3
VBUS [Power]: C1_BAT.1 C4_USB.1 C5_USB.1 CHG_LED.A D1.2 D2.2 MCP73831.4 PFMF.050.1.2 Q1.1 R1_PWRUSB.2 TP14.TP
VRTC: C8.1 C10_SUPERCAP.2 D7.1 R_CAPACITOR.1 R_CAPACITOR.2 U3.14
VUSB [Power]: J2.A4 J2.A9 J2.B4 J2.B9 PFMF.050.1.1

## Tracks (layer width: path | path; a pad name or v marks a point on that pad's centre or on a via)
3V3
  Top 0.3: J3.2 164.4,18.84 151.45,18.84 147.85,22.44 147.85,28.12 135.73,40.23 C3.+ 135.59,40.16 133.03,40.16 132.13,39.27 124.44,39.27 117.38,46.33 117.38,56.23 119.04,57.89 119.04,58.38 119.25,58.59 120.63,58.59 | R_CL1.1 78.81,24.1 78.81,29.92 79.22,30.33 Q2.3 79.29,30.54 79.29,35.18 89.47,45.36 89.47,45.64 R2-PINH1.2 89.61,45.77 89.61,47.09 92.59,50.07 92.59,50.41 93.56,51.38 | 93.56,51.38 93.97,51.38 R1_PINH1.2 | 120.63,58.59 120.63,61.56 C1_BAT2.1 120.5,61.7 117.93,61.7 117.86,61.77 91.48,61.77 | 120.63,58.59 120.63,57.62 122.36,55.88 122.36,55.61 IC4.5 | 91.48,61.77 91.48,61.29 90.79,60.59 90.44,60.59 89.54,59.69 U3.2 89.61,59.14 89.61,57.89 93.49,54.02 93.49,51.52 93.56,51.38 | 91.48,61.77 91.48,62.81 91.27,63.02 91.27,64.75 D7.2 91.13,64.89 90.3,64.89 89.68,65.51 66.13,65.51 50.76,50.14 49.79,50.14 U1.8 | 59,105.81 52.77,105.81 52.56,106.02 R_CHANGE.1 44.32,106.09 43.63,106.09 41.76,107.96 27.35,107.96 27.15,107.75 27.15,106.92 26.32,106.09 20.43,106.09 R_RESET.1 20.29,106.02 18.14,106.02 12.12,100 12.12,99.1 C9.1 11.98,98.96 11.98,95.5 6.92,90.44 5.75,90.44 J4.P4 5.54,90.37 5.12,89.96 5.05,89.96 0.76,85.66 0.76,66.89 6.65,61.01 6.65,51.45 11.18,46.92 | 59,105.81 59.62,106.44 R_BOOT.1 | 62.88,101.87 62.88,88.16 62.39,87.67 62.12,87.67 IC1.2 | 62.88,101.87 59.07,105.67 59,105.81 | TP16.TP 73.61,104.08 65.16,104.08 63.02,101.94 62.88,101.87 | R10.2 57.76,3.81 56.99,3.05 53.53,3.05 52.84,3.74 R5.2 52.7,3.81 51.94,3.05 48.48,3.05 47.78,3.74 R6.2 47.58,3.88 46.88,4.57 43.35,4.57 42.66,3.88 R7.2 42.52,3.81 41.76,3.05 38.3,3.05 37.6,3.74 R8.2 37.46,3.81 36.7,3.05 35.73,3.05 34.97,3.81 R9.2 32.34,3.95 32.34,5.33 25.76,11.91 24.93,11.91 13.92,22.92 13.92,23.06 13.5,23.48 12.81,23.48 R1.2 12.67,23.55 12.67,28.12 8.73,32.06 8.73,43.28 U2.2 8.79,43.42 8.79,44.53 11.18,46.92
  Top 0.3: U1.8 49.58,50.21 49.1,50.69 43.9,50.69 43.7,50.48 43.7,49.03 42.31,47.64 41.83,47.64 U1.3 41.69,47.64 11.91,47.64 11.18,46.92 | U1.7 49.65,48.96 49.65,50.07 U1.8
32KHZ  (via drill 0.3)
  Top 0.15: v88.22,46.88 88.22,45.77 R2-PINH1.1 | v90.16,58.1 90.16,58.59 90.79,59.21 U3.1 | v20.29,46.26 17.66,43.63 17.66,43.35 U2.9 | v57.48,48.75 79.08,48.75 81.65,51.31 v87.81,51.31
  Bottom 0.15: 88.22,51.31 88.22,52.56 87.32,53.46 87.32,53.74 90.16,56.58 v90.16,58.1 | 88.22,51.31 v88.22,46.88 | v20.29,46.26 39.54,46.26 42.03,48.75 v57.48,48.75 | 88.22,51.31 v87.81,51.31
DN
  Top 0.15: J2.A7 162.6,54.5 161.98,54.5 161.77,54.29 161.77,53.81 161.98,53.6 162.6,53.6 J2.B7 162.67,53.6 163.22,53.6 164.33,54.71 164.33,57.41 163.71,58.03 157.89,58.03 156.5,56.65 156.5,53.74 155.19,52.42 154.98,52.42 D1.1
DP  (via drill 0.3)
  Top 0.15: 163.43,54.57 163.43,54.78 163.22,54.98 162.67,54.98 J2.B6 | 163.43,54.57 163.43,54.36 163.15,54.08 162.67,54.08 J2.A6 | v156.02,54.43 155.88,54.29 154.98,54.29 D1.3 | v163.57,54.57 163.43,54.57
  Bottom 0.15: v156.02,54.43 163.43,54.43 v163.57,54.57
EPD_3V3
  Top 0.3: J1.15 82.55,15.44 82.13,15.44 J1.16 82.06,15.3 82.06,14.96 81.78,14.68 77.84,14.68 76.59,15.93 | 77.08,23.27 76.87,23.48 76.87,24.65 77.14,24.93 77.14,29.43 Q2.2 | 77.08,23.27 83.45,23.27 84.48,24.31 L1.2 | 76.59,15.93 76.59,22.71 77.01,23.13 77.08,23.27 | 59.69,17.24 63.43,17.24 64.75,15.93 EPD_C5.1 64.89,15.86 76.45,15.86 76.59,15.93 | 59.69,17.24 59.55,17.24 58.45,18.35 C7.1 | 59.69,17.24 59.69,4.5 57.76,2.56 31.09,2.56 25.41,8.24 25.41,8.86 TP17.TP
EPD_3V3_C  (via drill 0.3)
  Top 0.3: R_CL1.2 77.56,24.1 77.56,24.72 77.91,25.07 77.91,30.61 77.21,31.3 Q2.1 77.01,31.37 v75.62,31.37 | U2.18 20.15,60.87 20.15,61.22 27.49,68.56 35.52,68.56 TP13.TP 35.66,68.49 35.8,68.35 v38.64,68.35
  Bottom 0.3: v38.64,68.35 v75.62,31.37
EPD_BUSY  (via drill 0.3)
  Top 0.15: 86.81,13.81 90.09,10.53 102.28,10.53 109.21,3.6 109.21,2.15 TP9.TP | 86.81,13.81 85.59,15.03 85.59,15.37 J1.9 | v58.24,58.38 12.19,58.38 10.04,60.52 10.04,60.8 U2.26 | v86.77,13.71 86.77,13.78 86.81,13.81
  Bottom 0.15: v58.24,58.38 64.47,58.38 93.42,29.43 93.42,19.6 87.53,13.71 v86.77,13.71
EPD_CS  (via drill 0.3)
  Top 0.15: v84.07,14.13 84.07,15.37 J1.12 | v103.11,3.12 104.08,2.15 TP10.TP | v31.16,5.75 31.16,4.64 | 31.16,4.64 31.16,3.88 R9.1 | v31.16,16.48 31.16,17.73 D6.2 31.16,17.8 20.15,28.81 20.15,43.28 U2.11 | v31.02,4.64 31.16,4.64
  Bottom 0.15: 85.49,12.71 87.67,10.53 102.28,10.53 103.11,9.7 v103.11,3.12 | 85.49,12.71 v84.07,14.13 | v31.16,16.48 v31.16,5.75 | 85.49,12.71 83.31,10.53 48.2,10.53 41.83,4.16 31.51,4.16 v31.02,4.64
EPD_DC  (via drill 0.3)
  Top 0.15: v84.55,14.61 84.55,15.37 J1.11 | U2.5 12.53,43.28 12.53,43.07 v13.43,42.17 13.43,42.1 v12.4,41.06 | v2.15,30.82 2.15,29.22 TP11.TP
  Bottom 0.15: v84.55,14.61 83.24,14.61 82.61,15.23 51.04,15.23 24.1,42.17 v13.43,42.17 | v12.4,41.06 v2.15,30.82
EPD_RST  (via drill 0.3)
  Top 0.15: v86.15,13.71 85.11,14.75 85.11,15.37 J1.10 | v26.38,68.83 25.41,69.8 TP12.TP 25.35,69.8 25.07,69.8 16.34,61.08 16.34,60.87 U2.21
  Bottom 0.15: v86.15,13.71 86.63,13.23 87.46,13.23 93.69,19.46 93.69,29.57 64.4,58.86 48.75,58.86 38.78,68.83 v26.38,68.83
FLASH_CS  (via drill 0.3)
  Top 0.15: v40.65,50.14 41.76,50.14 U1.1 | v37.26,46.74 24.58,46.74 21.47,43.63 21.47,43.35 U2.12 21.47,43.28 21.47,28.81 31.92,18.35 31.92,12.67 | 31.92,12.67 27.42,12.67 D9.2 | 31.92,12.67 39.89,12.67 48.68,3.88 51.38,3.88 R5.1
  Bottom 0.15: v37.26,46.74 v40.65,50.14
GDR  (via drill 0.3)
  Top 0.15: v89.19,16.41 89.12,16.34 89.12,15.44 J1.2 | v61.15,15.72 60.39,16.48 R4.2 | v55.88,16.69 55.26,16.69 Q3.1
  Bottom 0.15: v89.19,16.41 88.71,15.93 61.35,15.93 v61.15,15.72 57.06,15.72 56.09,16.69 v55.88,16.69
GND  (via drill 0.3)
  Top 0.15: U4.4 55.82,69.67 56.16,69.67 56.72,70.22 56.72,70.36 U4.9 | U4.9 56.78,70.43 56.09,71.12 55.82,71.12 U4.1 56.09,71.19 56.09,80.68 62.05,86.63 IC1.3 | U4.6 57.76,70.15 56.72,70.15 U4.9 | IC1.3 62.12,86.7 63.85,86.7 64.33,87.19 67.1,87.19 67.24,87.05 C_DELAY.2 67.24,87.12 75.41,95.29 75.41,104.15 | CHANGE_BUTTON.1 47.3,107.2 50.69,107.2 CHANGE_BUTTON.2 51.45,106.51 53.32,106.51 C10.2 53.39,106.51 58.59,106.51 59.21,107.13 62.26,107.13 BOOT_BUTTON.1 65.72,107.2 BOOT_BUTTON.2 65.79,107.2 66.89,106.09 67.24,106.09 C6.2 67.38,106.02 73.54,106.02 75.41,104.15 | 75.41,104.15 81.23,104.15 TP5.TP | 25.97,13.99 25.97,12.74 D9.1 | 25.97,13.99 29.71,17.73 D6.1 | 25.97,13.99 25.9,13.99 22.16,17.73 D8.1 22.09,17.73 v19.88,17.73 | v15.03,13.43 14.34,12.74 D11.1 14.27,12.74 8.31,12.74 5.82,15.23 D10.1 5.54,15.3 5.54,33.79 2.56,36.77 TP4.TP 2.56,36.84 7.41,41.69 7.41,43.28 U2.1 7.48,43.35 v7.48,44.94 | RESET_BUTTON.2 25.69,107.2 22.3,107.2 RESET_BUTTON.1 22.23,107.27 21.47,107.27 20.84,107.89 17.52,107.89 11.04,101.42 | 3.91,94.28 3.05,95.15 3.05,95.43 J4.G4 | 3.91,94.28 5.54,92.66 5.68,92.66 J4.P6 | 3.91,94.28 11.04,101.42 | U2.29_9 14.4,51.87 13.23,51.87 U2.29_6 13.09,51.8 11.98,51.8 U2.29_3 | U2.29_1 11.91,49.38 U2.29_2 11.91,50.62 11.91,51.8 U2.29_3 | U2.29_4 13.16,49.38 11.98,49.38 U2.29_1 | U2.29_5 13.16,49.44 U2.29_4 | U2.29_4 13.23,49.38 14.4,49.38 U2.29_7 14.4,49.44 U2.29_8 | U2.29_3 11.84,51.87 7.48,56.23 7.48,60.8 U2.28 7.41,60.87 7.41,82.34 | C9.2 13.37,99.03 13.37,93.97 16.27,91.06 J4.G2 16.27,90.92 17.11,90.09 17.11,87.12 16.34,86.36 16.34,85.32 J4.G1 16.27,85.25 13.37,82.34 7.41,82.34
  Top 0.15: 28.6,106.02 28.6,105.54 22.09,99.03 13.43,99.03 C9.2 | 28.6,106.02 28.6,106.51 27.98,107.13 27.98,107.27 C5.2 | 7.41,82.34 2.08,82.34 J4.G3 | v11.91,100.55 11.04,101.42 | v12.67,99.79 13.37,99.1 C9.2 | v10.73,48.2 11.84,49.31 U2.29_1 | 28.6,106.02 42.73,106.02 43.07,105.67 43.07,105.54 61.98,86.63 IC1.3 | MCP73831.2 129.29,41.34 128.32,41.34 127.42,42.24 127.42,45.7 119.39,53.74 R1_PWRUSB.1 119.39,53.81 119.39,55.68 C1_BAT.2 119.46,55.68 119.87,55.68 v120.08,55.88 | C1_BAT1.2 121.95,64.13 121.95,61.63 C1_BAT2.2 121.95,61.56 121.95,59.62 122.88,58.69 | 122.88,58.69 125,56.58 125.14,56.58 IC4.2 125.2,56.58 127,56.58 128.81,58.38 R2_BAT.1 128.87,58.38 133.1,58.38 138.78,52.7 147.29,52.7 R2-USB1.1 147.36,52.63 149.86,50.14 149.86,45.15 C5_USB.2 149.79,45.08 v149.16,44.46 | v122.85,58.66 122.88,58.69 | 145.32,24.41 135.73,34 135.73,37.26 C3.- 135.66,37.26 98.75,37.26 | 145.32,24.41 151.87,17.87 164.4,17.87 J3.1 | J2.B12 162.6,50.97 J2.A1 162.67,50.9 162.67,49.72 163.15,49.24 J2.MP3 | 165.16,49.24 163.22,49.24 J2.MP3 | 165.16,49.24 167.1,49.24 J2.MP1 | D1.5 152.49,53.39 152.84,53.39 158.79,59.35 163.15,59.35 J2.MP4 163.22,59.42 165.16,59.42 | 165.16,59.42 J2.MP2 | 165.16,59.42 165.16,49.24 | C2_BAT.2 139.54,39.33 149.51,29.36 SENSOR2.1 149.51,29.29 v149.51,28.18 | 151.31,23.48 151.94,23.48 C1.2 | 151.31,23.48 150.69,23.48 C2.2 | 151.31,25.69 151.38,25.69 151.87,26.18 151.87,26.38 SENSOR2.5 151.94,26.45 151.94,28.18 154.91,31.16 154.91,36.08 | 151.31,25.69 150.76,25.69 150.34,26.11 150.34,26.38 SENSOR2.7 150.27,26.45 v150.27,27.42 | 151.31,25.69 151.31,23.48
  Top 0.15: J2.A12 162.6,57.62 162.6,57.41 J2.B1 162.53,57.34 158.31,57.34 157.54,56.58 R2-USB.2 157.47,56.51 156.78,55.82 156.78,53.05 154.98,51.24 154.98,48.96 C4_USB.2 154.98,48.89 155.6,48.27 155.6,46.26 154.91,45.57 154.91,36.08 | 154.91,36.08 156.78,36.08 163.15,42.45 163.15,49.17 J2.MP3 | v147.29,26.38 145.32,24.41 | EPD_C5.2 64.82,14.54 66.41,12.95 77.01,12.95 J1.MP2 77.08,12.95 84.42,12.95 v85.32,13.85 | 91,19.74 92.66,19.74 EPD_C1.2 92.73,19.67 92.73,19.53 93.42,18.84 93.42,15.93 90.51,13.02 J1.MP1 90.51,12.95 88.16,12.95 86.08,15.03 86.08,15.37 J1.8 | 91,19.74 90.23,19.74 EPD_C2.2 | C8.2 95.29,60.32 95.29,60.11 97.78,57.62 97.78,51.94 C10_SUPERCAP.1 97.85,51.87 97.85,51.38 98.75,50.48 98.75,37.26 | 88.29,19.04 88.29,17.94 87.6,17.24 83.03,17.24 81.58,15.79 81.58,15.44 J1.17 | 88.29,19.04 87.67,19.67 EPD_C6.2 | EPD_C6.2 87.6,19.74 85.11,19.74 EPD_C7.2 85.04,19.74 82.61,19.74 EPD_C8.2 82.55,19.74 80.05,19.74 EPD_C9.2 79.98,19.74 77.49,19.74 EPD_C10.2 77.49,19.8 77.49,20.08 v77.14,20.43 | EPD_C6.2 87.6,19.8 87.6,21.4 90.65,24.45 90.65,25.48 D3.1 90.72,25.55 95.08,29.92 97.5,29.92 EPD_C11.2 97.57,29.98 98.75,31.16 98.75,37.26 | v88.99,19.67 88.36,19.04 88.29,19.04 | v91,19.67 91,19.74 | SJ1.1 52.63,11.43 52.63,11.22 53.46,10.39 54.78,10.39 55.12,10.73 57.13,10.73 R2.1 57.2,10.8 59,12.6 59,16.48 R4.1 59,16.55 59,16.69 57.76,17.94 57.76,19.04 58.38,19.67 C7.2 58.45,19.74 69.22,30.5 | 74.93,20.43 74.93,24.65 71.67,27.91 D12.1 | 74.93,20.43 74.93,19.74 EPD_C12.2 | U3.13 86.98,49.93 86.98,43.42 71.67,28.12 71.67,27.98 D12.1 | 69.22,30.5 71.61,28.12 D12.1
  Top 0.15: 69.22,30.5 52.91,46.81 49.44,46.81 48.06,48.2 45.77,48.2 U1.9 45.7,48.2 43.9,46.4 41.83,46.4 U1.4 41.76,46.4 40.93,47.23 13.02,47.23 11.43,45.64 v10.73,45.64 | v75,20.43 74.93,20.43
  Bottom 0.15: v19.88,17.73 19.32,17.73 v15.03,13.43 | v12.67,99.79 v11.91,100.55 | v10.73,48.2 9.45,46.92 | 9.45,46.92 v7.48,44.94 | v122.85,58.66 v120.08,55.88 | v150.27,27.42 v149.51,28.18 | v147.29,26.38 147.64,26.38 149.44,28.18 v149.51,28.18 | v149.16,44.46 149.16,28.53 v149.51,28.18 | v88.99,19.67 89.68,19.67 | 89.68,19.67 v91,19.67 | v85.32,13.85 85.66,13.85 87.46,15.65 89.06,15.65 89.68,16.27 89.68,19.67 | v75,20.43 v77.14,20.43 | v10.73,45.64 9.45,46.92
GPIO8  (via drill 0.3)
  Top 0.15: v13.37,22.85 12.74,22.23 R1.1 | v17.52,41.69 18.84,43 18.84,43.28 U2.10
  Bottom 0.15: v13.37,22.85 13.37,37.53 v17.52,41.69
I2C_PW
  Top 0.3: R1_PINH.2 153.18,23.41 152,22.23 C1.1 151.94,22.16 150.83,22.16 C2.1 150.62,22.16 149.44,22.16 R2-PINH.2 149.3,22.23 148.68,22.85 148.68,25.62 149.37,26.32 SENSOR2.8 149.51,26.45 149.51,27.42 150.27,28.18 | 150.27,28.18 150.27,29.29 SENSOR2.2 150.34,29.43 150.34,40.03 151.1,40.79 151.1,55.12 153.74,57.76 153.74,65.3 152.97,66.06 25.62,66.06 21.47,61.91 21.47,60.87 U2.17 | SENSOR2.6 151.03,26.45 151.03,27.49 150.41,28.12 150.27,28.18
INT_RTC  (via drill 0.3)
  Top 0.15: v93.14,50.21 93.97,50.21 R1_PINH1.1 | U3.3 88.22,59.21 87.81,58.79 v87.81,53.6 83.52,53.6 80.12,50.21 v56.02,50.21 | v19.53,46.74 16.34,43.56 16.34,43.35 U2.8 | v87.67,66.62 87.67,104.08 TP15.TP
  Bottom 0.15: v93.14,50.21 91.2,50.21 v87.81,53.6 87.81,53.67 90.65,56.51 90.65,58.24 87.67,61.22 v87.67,66.62 | v19.53,46.74 36.63,46.74 40.51,50.62 51.52,50.62 51.94,50.21 v56.02,50.21
IO/BOOT  (via drill 0.3)
  Top 0.15: C6.1 67.24,107.34 65.93,108.65 65.79,108.65 BOOT_BUTTON.3 65.72,108.65 65.23,108.65 64.13,107.55 63.5,107.55 62.33,108.72 BOOT_BUTTON.4 62.19,108.65 61.35,107.82 59.69,107.82 R_BOOT.2 59.62,107.75 59.28,107.41 v58.86,107.41 | v23.96,63.64 23.96,60.87 U2.15
  Bottom 0.15: v23.96,63.64 23.96,72.5 v58.86,107.41
IO/CHANGE  (via drill 0.3)
  Top 0.15: C10.1 53.32,107.82 51.66,107.82 50.76,108.72 CHANGE_BUTTON.3 50.69,108.65 50.21,108.65 49.1,107.55 48.48,107.55 47.3,108.72 CHANGE_BUTTON.4 47.23,108.72 45.84,107.34 R_CHANGE.2 44.39,107.34 v43.77,106.71 | v42.59,105.54 42.59,95.5 13.85,66.76 13.85,60.87 U2.23
  Bottom 0.15: v43.77,106.71 v42.59,105.54
MISO  (via drill 0.3)
  Top 0.15: v36.22,12.19 36.22,3.88 R8.1 | v36.22,42.31 v36.22,29.43 | v42.17,48.27 42.17,48.54 U1.2 41.76,48.96 20.29,48.96 8.73,60.52 8.73,60.8 U2.27 8.66,60.87 8.66,61.22 v7.89,61.98 | v72.99,28.81 73.13,28.67 73.13,27.98 D12.2 | v6.92,92.86 6.09,93.69 5.96,93.69 J4.P7 | v88.29,21.47 101.73,21.47 121.05,2.15 124.44,2.15 TP6.TP
  Bottom 0.15: v36.22,29.43 v36.22,12.19 | v36.22,42.31 v42.17,48.27 42.24,48.27 61.7,28.81 v72.99,28.81 78.46,28.81 79.84,27.42 79.84,19.25 80.54,18.56 80.81,18.56 85.45,23.2 86.56,23.2 v88.29,21.47 | v6.92,92.86 6.92,62.95 v7.89,61.98
MOSI  (via drill 0.3)
  Top 0.15: v82.61,14.61 83.03,15.03 83.03,15.37 J1.14 | v41.69,4.64 41.69,4.29 41.27,3.88 R7.1 | v51.66,14.68 49.65,16.69 49.65,46.33 U1.5 | v30.54,5.75 23.61,12.67 15.79,12.67 D11.2 | v15.1,26.87 15.1,43.28 U2.7 15.17,43.28 15.17,44.6 v13.09,46.67 | v13.09,82.82 6.65,89.26 5.96,89.26 J4.P3 | v115.72,2.15 119.32,2.15 TP7.TP | v84.69,12.6 v86.22,12.6
  Bottom 0.15: 51.66,14.61 v82.61,14.61 82.68,14.61 v84.69,12.6 | 51.66,14.61 v41.69,4.64 31.65,4.64 v30.54,5.75 30.54,7.69 15.1,23.13 v15.1,26.87 | v51.66,14.68 51.66,14.61 | v13.09,46.67 v13.09,82.82 | v115.72,2.15 111.08,2.15 100.62,12.6 v86.22,12.6
N$1  (via drill 0.3)
  Top 0.15: v150.06,53.95 147.36,53.95 R2-USB1.2 | v163.57,53.32 163.43,53.32 163.22,53.12 162.67,53.12 J2.A5
  Bottom 0.15: v150.06,53.95 162.94,53.95 v163.57,53.32
N$2  (via drill 0.3)
  Top 0.15: v160.8,55.26 157.54,55.26 R2-USB.1 | v163.57,55.61 163.15,56.02 162.67,56.02 J2.B5
  Bottom 0.15: v160.8,55.26 163.22,55.26 v163.57,55.61
N$3  (via drill 0.3)
  Top 0.15: Q1.2 134.83,54.29 133.58,55.54 125.2,55.54 IC4.1 125.14,55.61 124.72,56.02 124.65,56.02 123.06,57.62 123.06,57.89 122.78,58.17 122.71,58.17 121.19,59.69 121.19,62.19 119.94,63.43 v119.87,63.43 120.56,64.13 C1_BAT1.1 120.63,64.19 121.26,64.82 122.36,64.82 125.14,62.05 125.14,57.55 IC4.3 | v117.66,61.22 117.66,57.82 D2.1
  Bottom 0.15: v119.87,63.43 v117.66,61.22
N$5  (via drill 0.3)
  Top 0.15: v77.14,17.31 78.05,16.41 78.05,15.44 J1.24 | v76.04,18.42 75,18.42 EPD_C12.1
  Bottom 0.15: v76.04,18.42 v77.14,17.31
N$6  (via drill 0.3)
  Top 0.15: v74.1,18.35 59.69,18.35 C4.1 | v92.93,25.48 94.18,25.48 D3.2 | v92.93,29.29 94.18,30.54 D4.1
  Bottom 0.15: v74.1,18.35 75.48,18.35 77.35,16.48 83.93,16.48 v92.93,25.48 v92.93,29.29
N$7
  Top 0.15: CHG_LED.C 126.73,42.03 125.76,42.03 124.44,40.72 124.3,40.72 R1_BAT.1
N$8  (via drill 0.3)
  Top 0.15: v125.07,41.97 124.3,41.97 R1_BAT.2 | v128.32,41.97 129.01,41.97 129.29,42.24 MCP73831.1
  Bottom 0.15: v128.32,41.97 v125.07,41.97
N$9  (via drill 0.3)
  Top 0.15: v129.71,58.86 128.87,59.69 R2_BAT.2 | v129.71,44.46 131.85,42.31 MCP73831.5
  Bottom 0.15: v129.71,44.46 v129.71,58.86
N$10
  Top 0.15: C_DELAY.1 67.24,88.29 65.23,88.29 64.96,88.57 IC1.5
N$11
  Top 0.15: J1.22 79.08,15.44 79.08,17.11 77.84,18.35 77.49,18.35 EPD_C10.1
N$13
  Top 0.15: J1.20 80.12,15.44 80.12,15.93 82.55,18.35 EPD_C8.1
N$14
  Top 0.15: J1.19 80.61,15.44 80.61,15.86 82.55,17.8 84.48,17.8 85.04,18.35 EPD_C7.1
N$15
  Top 0.15: J1.18 81.09,15.44 81.09,15.79 82.82,17.52 86.77,17.52 87.6,18.35 EPD_C6.1
N$17
  Top 0.15: J1.5 87.6,15.44 87.6,16.07 89.89,18.35 90.16,18.35 EPD_C2.1
N$18
  Top 0.15: J1.4 88.09,15.37 88.09,15.03 88.36,14.75 89.75,14.75 92.66,17.66 92.66,18.35 EPD_C1.1
PREVGH  (via drill 0.3)
  Top 0.15: J1.21 79.64,15.44 79.64,18 79.98,18.35 EPD_C9.1 80.05,18.42 v80.68,19.04 | v83.65,30.33 86.22,32.89 D5.1
  Bottom 0.15: v83.65,30.33 83.65,22.02 v80.68,19.04
PREVGL  (via drill 0.3)
  Top 0.15: v78.6,16.97 78.6,15.44 J1.23 | v86.36,22.71 90.65,27.01 90.65,30.54 D4.2 90.72,30.61 91.34,31.23 97.5,31.23 EPD_C11.1
  Bottom 0.15: v78.6,16.97 80.61,16.97 v86.36,22.71
RESE  (via drill 0.3)
  Top 0.15: v88.57,16.41 88.57,15.44 J1.3 | Q3.2 56.58,16.69 57.06,16.2 v57.2,16.2 57.06,16.14 55.26,14.34 55.26,13.99 R3.2
  Bottom 0.15: v88.57,16.41 84.28,16.41 84.07,16.2 v57.2,16.2
RESE'
  Top 0.15: R3.1 54.02,13.92 54.02,11.56 54.08,11.49 SJ1.2 54.08,12.12 57.13,12.12 R2.2
RESET  (via drill 0.3)
  Top 0.15: v21.19,106.92 20.84,107.27 20.36,107.27 R_RESET.2 | v21.19,108.17 21.74,108.17 22.23,108.65 RESET_BUTTON.4 22.3,108.72 25.69,108.72 RESET_BUTTON.3 | v27.08,106.09 27.91,106.09 C5.1 | v45.64,105.05 62.05,88.64 IC1.1 | v9.49,44.46 9.97,43.97 9.97,43.35 U2.3
  Bottom 0.15: v21.19,108.17 v21.19,106.92 | v21.19,106.92 21.26,106.92 22.09,106.09 v27.08,106.09 27.15,106.09 28.18,105.05 v45.64,105.05 | v9.49,44.46 7.34,44.46 6.44,45.36 6.44,93 12.74,99.31 13.5,99.31 21.12,106.92 v21.19,106.92
RTC_RST  (via drill 0.3)
  Top 0.15: v59.69,59.83 23.41,59.83 22.71,60.52 22.71,60.8 U2.16 | v78.05,59.83 80.88,59.83 81.58,60.52 86.08,60.52 86.98,59.62 86.98,59.28 U3.4
  Bottom 0.15: v78.05,59.83 v59.69,59.83
RX
  Top 0.15: U2.24 12.53,60.87 12.53,67.1 19.04,73.61 TP2.TP
SCK  (via drill 0.3)
  Top 0.15: v52.08,50.69 52.08,50.34 49.65,47.92 49.65,47.64 U1.6 | v14.68,44.46 13.85,43.63 13.85,43.35 U2.6 | v7.41,91.69 7.27,91.55 5.96,91.55 J4.P5 | TP8.TP 114.26,2.15 96.12,20.29 89.61,20.29 89.47,20.15 89.47,18.7 87.74,16.97 84.76,16.97 83.58,15.79 83.58,15.44 J1.13 83.52,15.37 83.52,14.89 82.75,14.13 66.34,14.13 65.3,15.17 64.19,15.17 60.25,11.22 v60.25,10.04 | v43.42,3.88 46.33,3.88 R6.1 | v7.89,14.47 7.13,15.23 D10.2
  Bottom 0.15: v52.08,50.69 51.87,50.69 51.66,50.9 21.12,50.9 | 21.12,50.9 v14.68,44.46 14.68,44.04 12.88,42.24 12.88,19.53 7.89,14.54 v7.89,14.47 18.49,3.88 v43.42,3.88 43.49,3.88 49.65,10.04 v60.25,10.04 | v7.41,91.69 7.41,89.12 21.12,75.41 21.12,50.9
SCL  (via drill 0.3)
  Top 0.15: v149.44,25.48 149.44,23.48 R2-PINH.1 | v151.45,27.91 151.45,28.12 151.87,28.53 151.87,29.29 SENSOR2.4 | v152.56,26.73 156.78,26.73 162.67,20.84 164.4,20.84 J3.4 | 58.38,69.46 58.38,70.29 58.1,70.57 57.82,70.57 U4.7 | 58.38,69.46 58.17,69.25 36.63,69.25 36.08,69.8 27.98,69.8 20.01,61.84 18.35,61.84 17.66,61.15 17.66,60.87 U2.20 | v88.78,55.82 90.79,53.81 90.79,50 U3.16 90.86,49.93 91.06,49.72 v91.48,49.72 | v58.52,69.39 58.45,69.46 58.38,69.46
  Bottom 0.15: 149.44,25.9 v149.44,25.48 | 149.44,25.9 v151.45,27.91 151.45,27.84 v152.56,26.73 | v88.78,55.82 83.31,55.82 69.73,69.39 v58.52,69.39 | 149.44,25.9 108.17,25.9 91.48,42.59 v91.48,49.72
SDA  (via drill 0.3)
  Top 0.15: 153.87,22.09 161.01,22.09 163.29,19.8 164.4,19.8 J3.3 | 153.87,22.09 153.25,22.09 R1_PINH.1 | v151.1,28.39 151.1,29.29 SENSOR2.3 | 153.87,22.09 v153.87,26.11 | v71.88,66.62 67.38,71.12 57.82,71.12 U4.8 | v87.74,48.68 88.57,48.68 89.47,49.58 89.47,49.93 U3.15 | v58.59,59.35 20.08,59.35 18.91,60.52 18.91,60.8 U2.19
  Bottom 0.15: v151.1,28.39 151.59,28.39 153.22,26.77 | v153.87,26.11 153.22,26.77 | v58.59,59.35 65.86,66.62 v71.88,66.62 87.74,50.76 v87.74,48.68 87.74,48.61 86.98,47.85 86.98,46.67 108.65,25 151.45,25 153.22,26.77
SRC  (via drill 0.3)
  Top 0.15: 82.75,30.61 82.75,32.89 D5.2 | 82.75,30.61 84.48,28.88 L1.1 | v59.76,20.43 59.69,20.36 59.69,19.74 C4.2 | v57.48,20.43 Q3.3 | v79.36,27.29 82.68,30.61 82.75,30.61
  Bottom 0.15: v57.48,20.43 v59.76,20.43 59.83,20.43 66.69,27.29 v79.36,27.29
SS_SD  (via drill 0.3)
  Top 0.15: v32.41,15.86 41.76,15.86 53.74,3.88 56.44,3.88 R10.1 | v24.38,16.97 23.61,17.73 D8.2 23.55,17.8 11.29,30.05 11.29,43.28 U2.4 11.22,43.35 v11.22,44.46 | v11.22,83.24 6.3,88.16 J4.P2
  Bottom 0.15: v32.41,15.86 31.3,16.97 v24.38,16.97 | v11.22,44.46 v11.22,83.24
TX
  Top 0.15: U2.25 11.29,60.87 11.29,73.47 11.43,73.61 TP1.TP
USB_D+  (via drill 0.3)
  Top 0.15: v151.73,54.98 D1.4 | v87.19,32.83 v94.53,40.16 | v47.85,43.28 23.96,43.28 U2.14
  Bottom 0.15: v151.73,54.98 150.48,54.98 137.67,42.17 137.67,40.51 137.32,40.16 v94.53,40.16 | v87.19,32.83 77.7,32.83 75.76,30.89 60.25,30.89 v47.85,43.28
USB_D-  (via drill 0.3)
  Top 0.15: v151.66,51.59 152.42,52.35 D1.6 | v96.74,37.95 87.39,28.6 87.39,27.21 86.84,26.66 v79.36,26.66 | v24.65,42.24 23.48,42.24 22.71,43 22.71,43.28 U2.13
  Bottom 0.15: v151.66,51.59 149.16,51.59 135.52,37.95 v96.74,37.95 | v79.36,26.66 66.62,26.66 59.9,19.94 46.95,19.94 v24.65,42.24
VBAT  (via drill 0.3)
  Top 0.15: U4.2 55.82,70.57 55.82,70.15 U4.3 55.75,70.08 v54.98,70.08 | v137.18,40.65 139.47,40.65 C2_BAT.1 | v130.26,40.65 129.64,40.65 129.36,40.37 MCP73831.3 | v134.21,55.54 134,55.75 134,56.3 Q1.3 | v151.17,59.76 152.35,60.94 TP3.TP
  Bottom 0.15: v130.26,40.65 134.21,40.65 | 134.21,40.65 v137.18,40.65 | 134.21,40.65 v134.21,55.54 | v54.98,70.08 88.78,70.08 99.51,59.35 130.33,59.35 134.14,55.54 v134.21,55.54 | v151.17,59.76 138.5,59.76 134.28,55.54 v134.21,55.54
VBUS  (via drill 0.3)
  Top 0.3: D1.2 154.91,53.32 154.5,53.32 154.01,52.84 154.01,48.54 154.91,47.64 C4_USB.1 154.84,47.51 154.84,46.05 151.9,43.11 | 151.9,43.11 151.59,42.8 151.59,38.3 151.45,38.16 PFMF.050.1.2 | R1_PWRUSB.2 118.07,53.81 118.07,55.68 C1_BAT.1 118.14,55.82 119.56,57.23 | 119.56,57.23 119.73,57.41 119.73,57.76 D2.2 | CHG_LED.A 126.8,40.51 127.83,40.51 128.6,39.75 131.3,39.75 131.85,40.3 MCP73831.4 131.99,40.44 135.31,43.77 | 135.31,43.77 149.86,43.77 C5_USB.1 149.93,43.9 150.62,44.6 | 135.31,43.77 135.25,43.9 133.03,46.12 133.03,54.22 Q1.1 132.89,54.36 122.43,54.36 119.56,57.23 | 150.62,44.6 150.62,61.01 152.35,62.74 152.35,64.75 TP14.TP | v151.66,43.35 151.9,43.11 | v150.55,44.46 150.62,44.6
  Bottom 0.3: v150.55,44.46 v151.66,43.35
VRTC  (via drill 0.3)
  Top 0.15: C10_SUPERCAP.2 97.78,49.72 95.29,52.22 95.29,59 C8.1 95.22,59.07 v93.21,59.07 | R_CAPACITOR.1 89.54,62.26 90.79,62.26 R_CAPACITOR.2 90.86,62.19 v90.86,61.42 | D7.1 89.12,64.75 89.12,62.74 89.54,62.33 R_CAPACITOR.1 | U3.14 88.29,50 88.29,57.69 88.99,58.38 88.99,61.7 89.47,62.19 R_CAPACITOR.1
  Bottom 0.15: v90.86,61.42 v93.21,59.07
VUSB
  Top 0.3: J2.A4 162.6,51.8 162.6,52.01 J2.B9 162.46,52.08 161.91,52.08 | J2.A9 162.6,56.78 162.6,56.58 J2.B4 162.46,56.51 161.91,56.51 161.35,55.95 161.35,52.63 161.91,52.08 | 161.91,52.08 161.84,51.94 161.84,51.66 155.95,45.77 155.95,38.16 PFMF.050.1.1